# Altium PCB LPTCON.PCBDOC
Units mm, origin at the board's own origin, x right, y up, seen from the top; angles counter-clockwise.
Board outline 152.4 x 101.6 mm, 2 copper layers (Top Layer, Bottom Layer); 2 components, 0 nets, 42 pads, 0 vias.
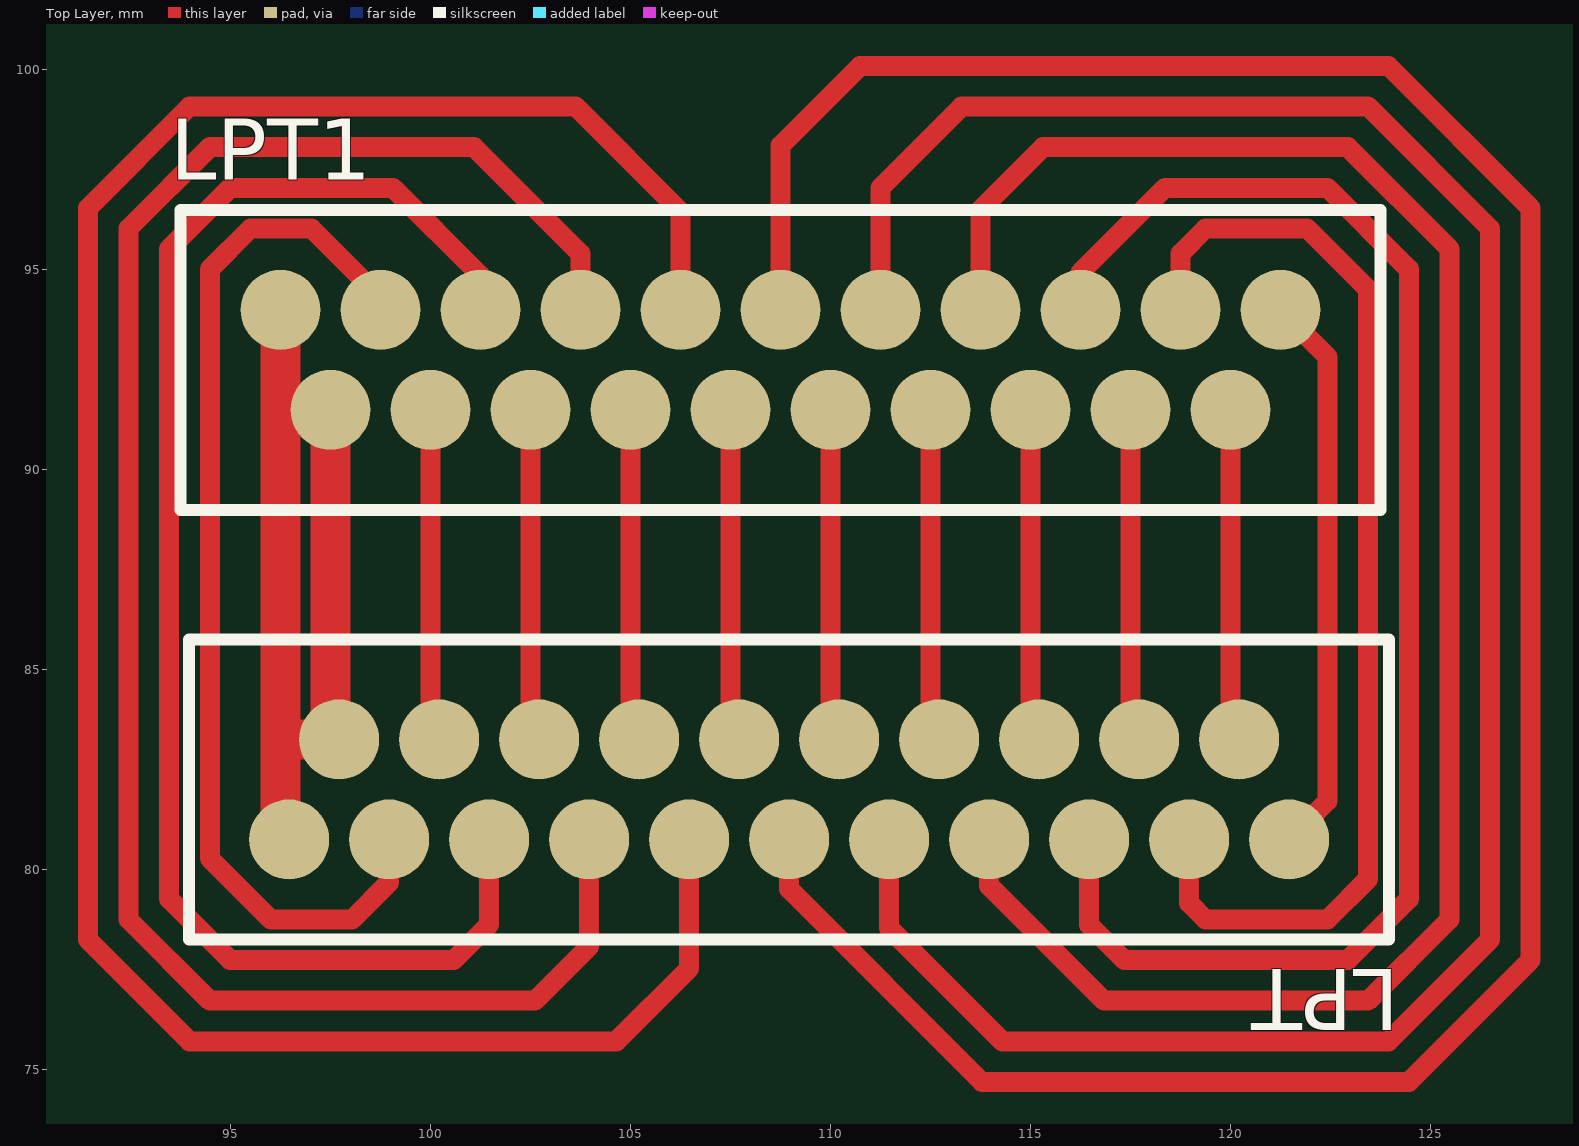
[diagram p0: Top Layer view]
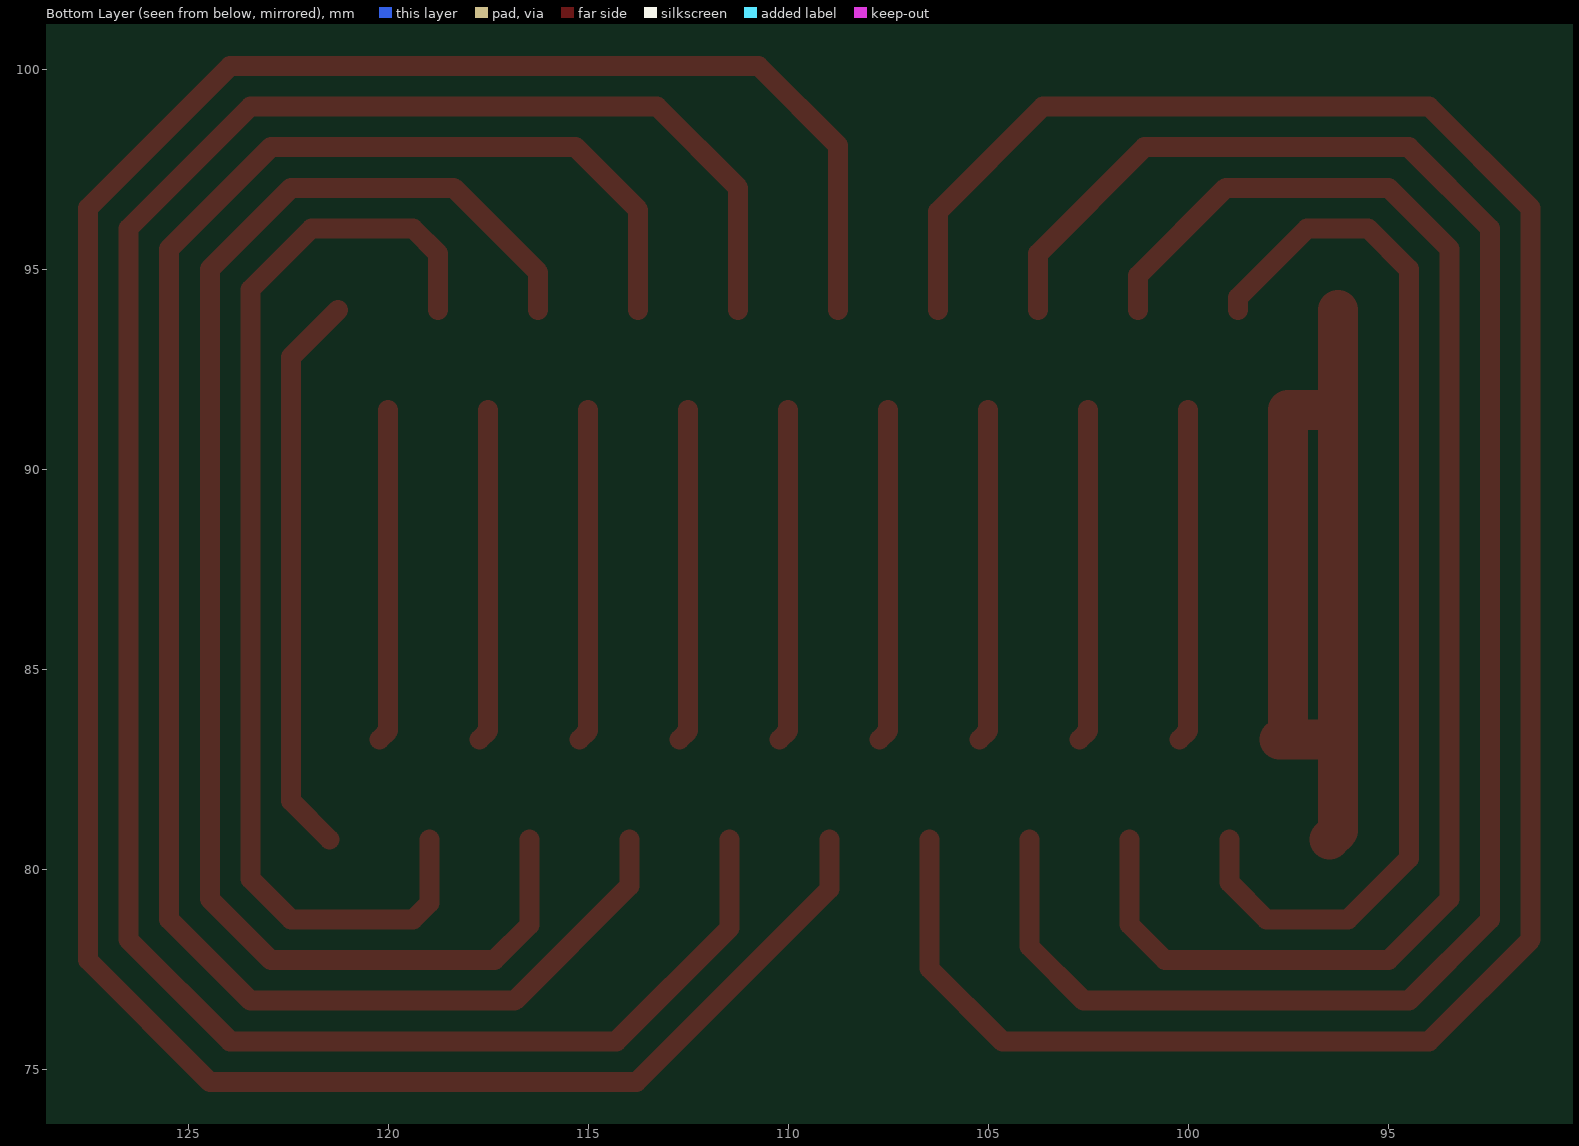
[diagram p1: Bottom Layer view, seen from below]

## Layer stack, top to bottom
Top Layer: signal copper 0.0356
Dielectric: dielectric 0.32, FR-4, Dk 4.8
Bottom Layer: signal copper 0.0356

## Board outline
25.4,25.4 177.8,25.4 177.8,127 25.4,127

## Design rules (kind name [scope] priority, off if disabled: settings)
Clearance [All] p1: gap=0.254
ComponentClearance [All] p1: gap=0.254 collisioncheckmode=0
PolygonConnect [All] p1: connectstyle=Relief reliefconductorwidth=0.254 reliefentries=4 polygonreliefangle="90 Angle"
RoutingLayers [All] p1: top layer=Horizontal bottom layer=Vertical
RoutingVias [All] p1: holewidth=0.711 width=1.27 viastyle="Through Hole" minholewidth=0.711 minwidth=1.27 maxholewidth=0.711 maxwidth=1.27
SolderMaskExpansion [All] p1: expansion=0.102
TestPointUsage [All] p1: valid=0 allowmultiple=FALSE
Testpoint [All] p1: side=15 testpointundercomponent=TRUE minsize=1.016 maxsize=2.54 preferedsize=1.524 minholesize=0 maxholesize=1.016 preferedholesize=0.813 testpointgrid=0.025 style=1023 order=1234567890
Width [All] p1: maxlimit=0.254 minlimit=0.254 preferedwidth=0.254
16 further rules are at their usual default settings.

## Components (designator, comment, footprint, x,y, rotation, side; value= is the part's Value field where it differs from the comment)
LPT "Connector 36" PCBComponent_1 106.47,80.74 r180 top
LPT1 "Connector 36" PCBComponent_1 111.252,93.98 r0 top

## Footprints (in the part's own frame and the unit in brackets; to place one, negate y for a bottom-side part, rotate by r counter-clockwise, add the part's x,y. Pads: shape width x height; smd on the part's side, far side on the other; paste and mask are expansions set on the pad)
PCBComponent_1 [mm]
  round 2 smd: 1(0,0) 2(2.5,0) 3(5,0) 4(7.5,0) 5(10,0) 6(8.75,-2.5) 7(6.25,-2.5) 8(3.75,-2.5) 9(1.25,-2.5) 10(-1.25,-2.5) 11(-3.75,-2.5) 12(-6.25,-2.5) 13(-8.75,-2.5) 14(-11.25,-2.5) 18(-12.5,0) 30(-13.75,-2.5) 31(-2.5,0) 32(-5,0) 33(-15,0) 35(-10,0) 36(-7.5,0)
  silkscreen extent -17.5,-5 12.5,2.5

## Nets (pads, with @x,y where several pads share a name; then routed paths per layer and width w, separated by ;. In a path a pad name is that pad's centre, name@x,y a point inside that pad or via, vN(x,y) a via of type N, cw(c..) or ccw(c..) an arc to the next point about the centre after c; other vN are vias at no path point)
pads on no net: LPT1.1 LPT1.2 LPT1.3 LPT1.4 LPT1.5 LPT1.6 LPT1.7 LPT1.8 LPT1.9 LPT1.10 LPT1.11 LPT1.12 LPT1.13 LPT1.14 LPT1.18 LPT1.30 LPT1.31 LPT1.32 LPT1.33 LPT1.35 LPT1.36 LPT.1 LPT.2 LPT.3 LPT.4 LPT.5 LPT.6 LPT.7 LPT.8 LPT.9 LPT.10 LPT.11 LPT.12 LPT.13 LPT.14 LPT.18 LPT.30 LPT.31 LPT.32 LPT.33 LPT.35 LPT.36
copper on no net: | length 521.6
  Top Layer w0.5: 97.464,83.24 97.72,83.24 97.502,83.458 ; 98.752,93.98 98.752,94.288 97.028,96.012 95.504,96.012 94.488,94.996 94.488,80.264 96.012,78.74 98.044,78.74 98.97,79.666 98.97,80.74 ; 100.002,91.48 100.002,83.458 100.22,83.24 ; 101.252,93.98 101.252,94.836 99.06,97.028 94.996,97.028 93.472,95.504 93.472,79.248 94.996,77.724 100.584,77.724 101.47,78.61 101.47,80.74 ; 102.502,91.48 102.502,83.458 102.72,83.24 ; 103.752,93.98 103.752,95.384 101.092,98.044 94.488,98.044 92.456,96.012 92.456,78.74 94.488,76.708 102.616,76.708 103.97,78.062 103.97,80.74 ; 105.002,91.48 105.002,83.458 105.22,83.24 ; 106.252,93.98 106.252,96.44 103.632,99.06 93.98,99.06 91.44,96.52 91.44,78.232 93.98,75.692 104.648,75.692 106.47,77.514 106.47,80.74 ; 107.502,91.48 107.502,83.458 107.72,83.24 ; 108.752,93.98 108.752,98.084 110.744,100.076 123.952,100.076 127.508,96.52 127.508,77.724 124.46,74.676 113.792,74.676 108.97,79.498 108.97,80.74 ; 110.002,91.48 110.002,83.458 110.22,83.24 ; 111.252,93.98 111.252,97.028 113.284,99.06 123.444,99.06 126.492,96.012 126.492,78.232 123.952,75.692 114.3,75.692 111.47,78.522 111.47,80.74 ; 112.502,91.48 112.502,83.458 112.72,83.24 ; 113.752,93.98 113.752,96.48 115.316,98.044 122.936,98.044 125.476,95.504 125.476,78.74 123.444,76.708 116.84,76.708 113.97,79.578 113.97,80.74 ; 115.002,91.48 115.002,83.458 115.22,83.24 ; 116.252,93.98 116.252,94.916 118.364,97.028 122.428,97.028 124.46,94.996 124.46,79.248 122.936,77.724 117.348,77.724 116.47,78.602 116.47,80.74 ; 117.502,91.48 117.502,83.458 117.72,83.24 ; 118.752,93.98 118.752,95.384 119.38,96.012 121.92,96.012 123.444,94.488 123.444,79.756 122.428,78.74 119.38,78.74 118.97,79.15 118.97,80.74 ; 120.002,91.48 120.002,83.458 120.22,83.24 ; 121.252,93.98 122.428,92.804 122.428,81.698 121.47,80.74
  Top Layer w1: 96.252,93.98 96.252,80.958 96.47,80.74 ; 96.292,91.48 97.502,91.48 97.502,83.458 ; 96.324,83.24 97.72,83.24